# Altium PCB IsoDiffProbe.PcbDoc
Units mm, origin at the board's own origin, x right, y up, seen from the top; angles counter-clockwise.
Board outline 77.2 x 49.12 mm, 2 copper layers (Top Layer, Bottom Layer); 79 components, 48 nets, 187 pads, 218 vias.
Unrouted connection lines stored in the file: 22.
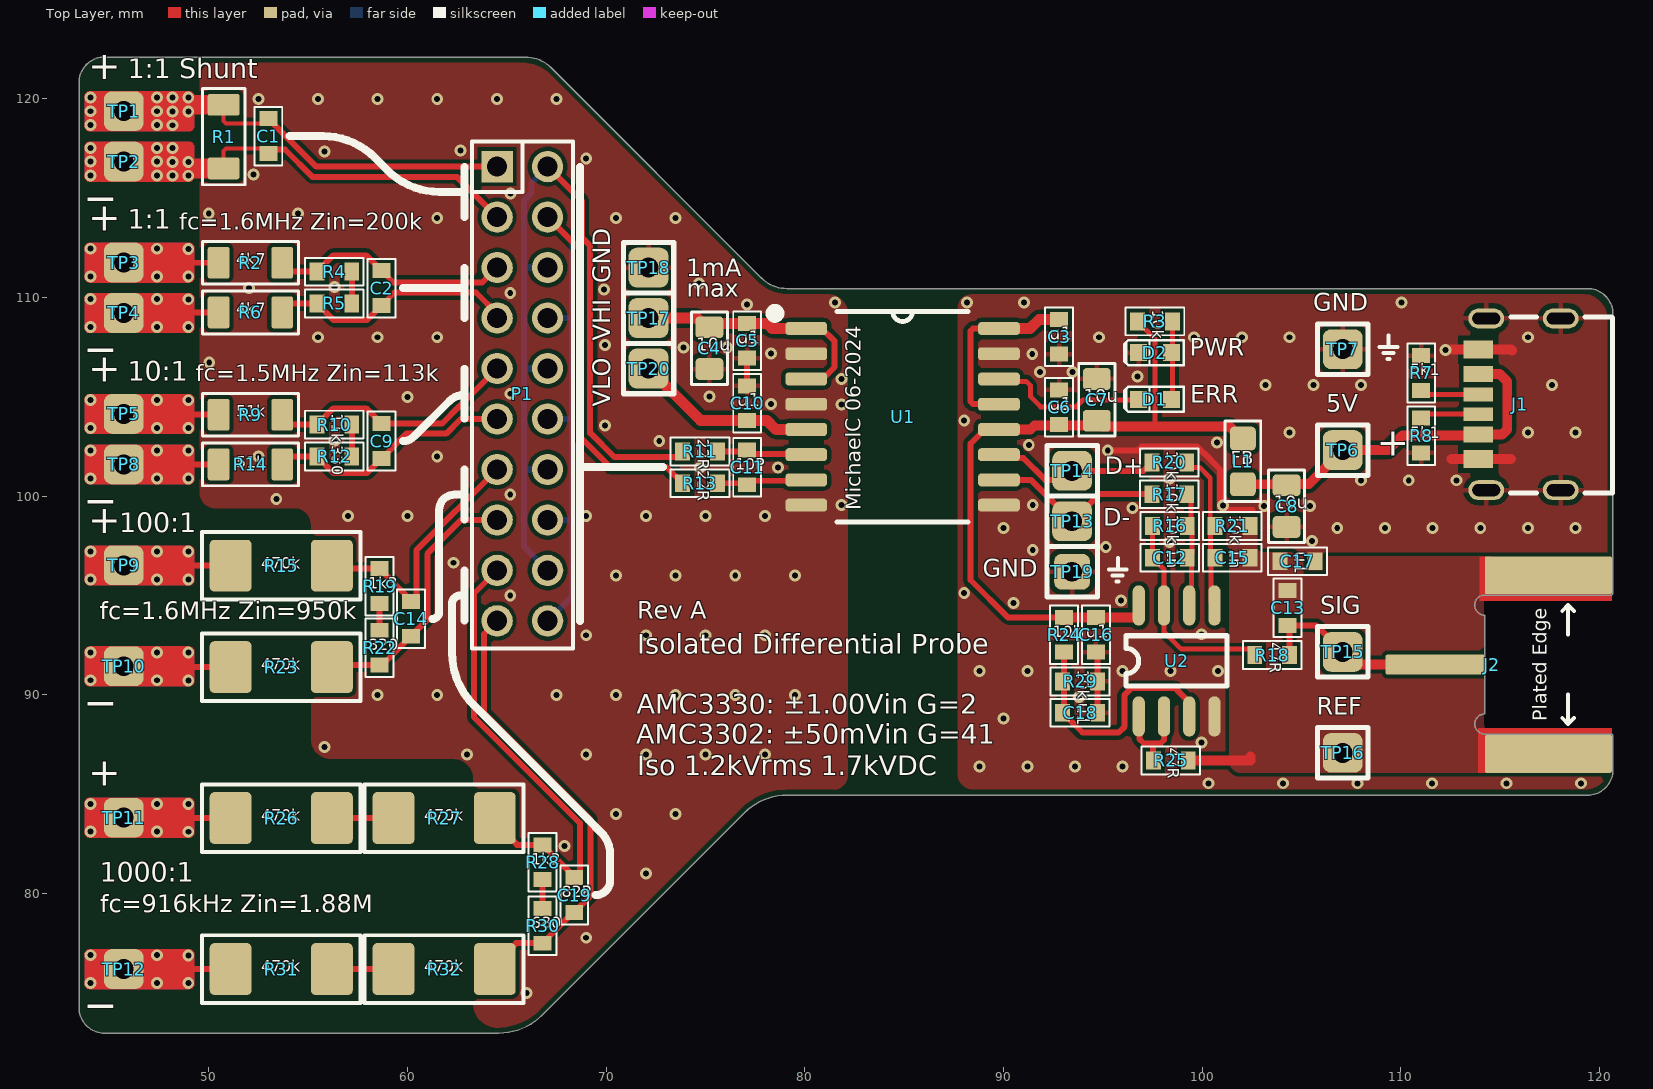
[diagram p0: Top Layer view]
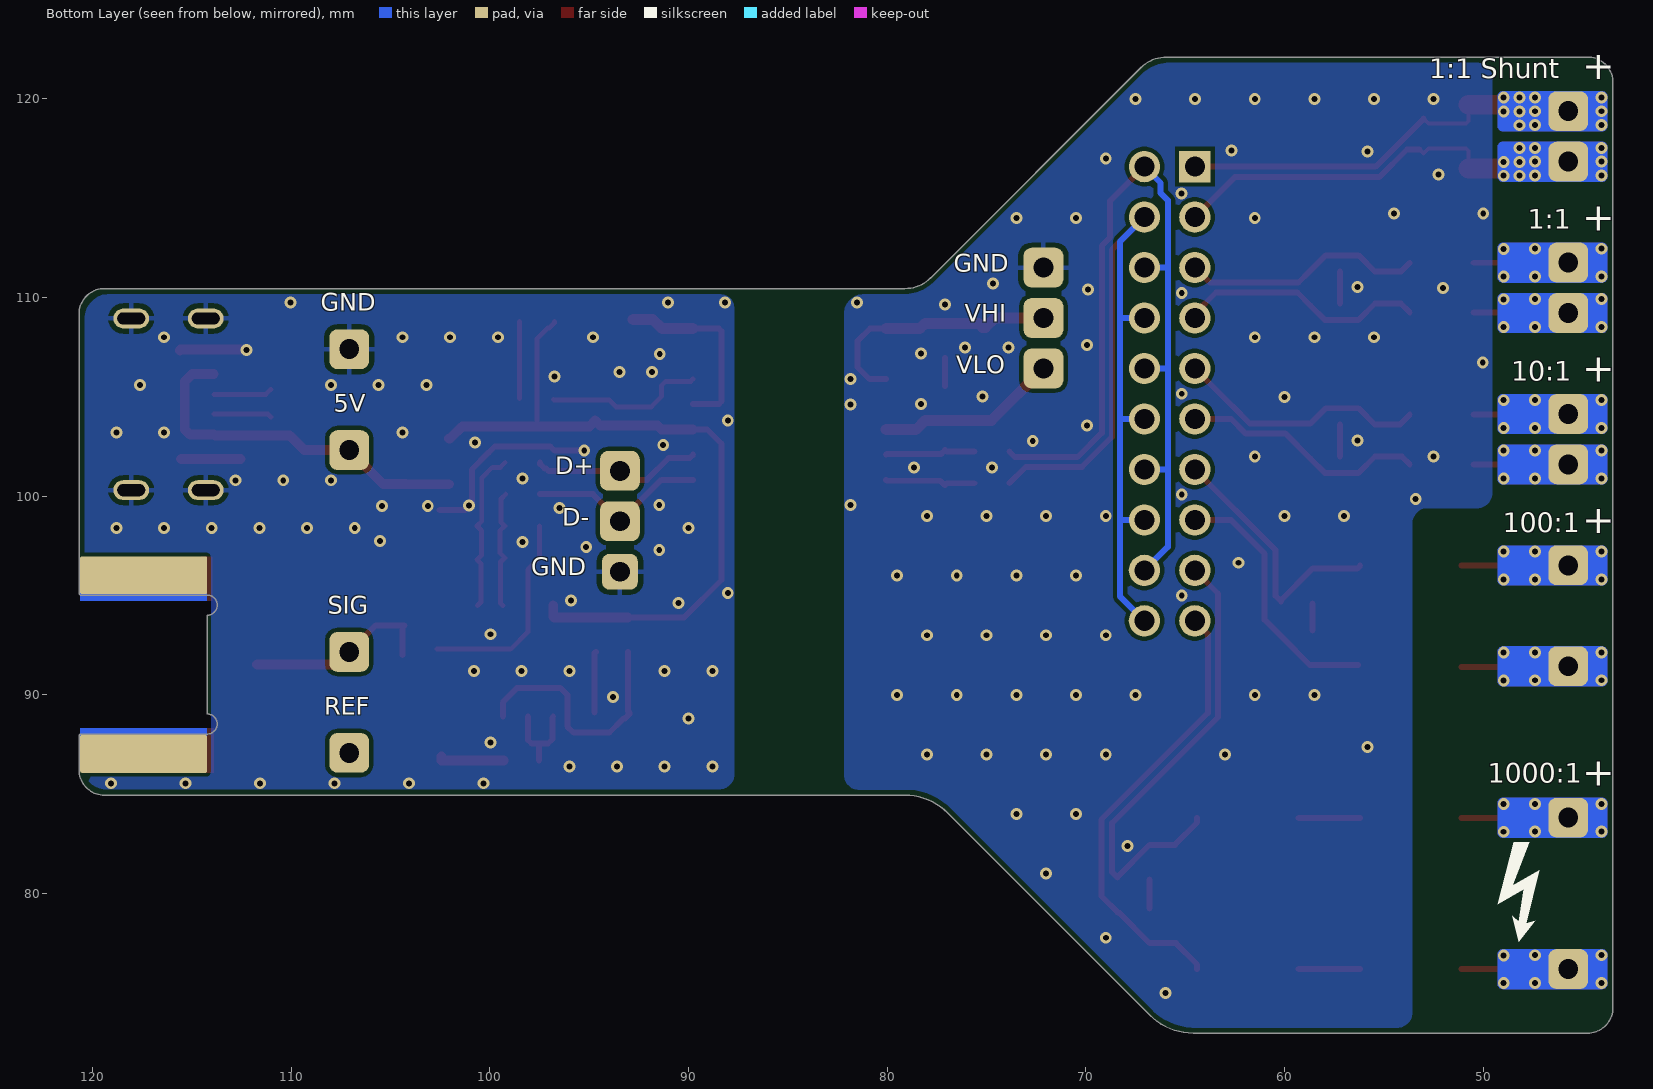
[diagram p1: Bottom Layer view, seen from below]

## Layer stack, top to bottom
Top Solder: solder mask 0.0102, Solder Resist, Dk 3.5
Top Layer: signal copper 0.0356
Dielectric 1: dielectric 0.32, FR-4, Dk 4.8
Bottom Layer: signal copper 0.0356
Bottom Solder: solder mask 0.0102, Solder Resist, Dk 3.5

## Board outline
44.745,72.975 64.605,72.975 ccw(c64.605,76.041) 66.773,73.873 76.952,84.052 cw(c79.12,81.884) 79.12,84.95 119.405,84.95 ccw(c119.405,86.22) 120.675,86.22 120.675,87.975 120.625,88.025 114.233,88.025 cw(c114.233,88.533) 113.725,88.533 cw(c114.233,88.533) 114.225,89.041 114.225,94.009 cw(c114.233,94.517) 113.725,94.517 cw(c114.233,94.517) 114.233,95.025 120.625,95.025 120.675,95.075 120.675,109.18 ccw(c119.405,109.18) 119.405,110.45 79.112,110.45 cw(c79.112,112.29) 77.811,110.989 67.239,121.561 ccw(c65.938,120.26) 65.938,122.1 44.745,122.1 ccw(c44.745,120.83) 43.475,120.83 43.475,74.245 ccw(c44.745,74.245)

## Design rules (kind name [scope] priority, off if disabled: settings)
Clearance Isolation [InNetClass('ISOLATED') vs not InNetClass('ISOLATED')] p1: gap=5.5 ignorepadtopadclearanceinfootprint=FALSE
Clearance [All] p2: gap=0.203 ignorepadtopadclearanceinfootprint=FALSE
HoleSize [All] p1: absolutevalues=TRUE maxlimit=2.54 minlimit=0.3 maxpercent=80.000 minpercent=20.000
MinimumSolderMaskSliver [All] p1: minsoldermaskwidth=0.076
PolygonConnect vgnd [InNet('VGND')] p1: connectstyle=Direct reliefconductorwidth=0.254 reliefentries=4 polygonreliefangle="90 Angle" airgapwidth=0.254
PolygonConnect isvia [isvia] p2: connectstyle=Direct reliefconductorwidth=0.254 reliefentries=4 polygonreliefangle="90 Angle" airgapwidth=0.254
PolygonConnect [All] p3: connectstyle=Relief reliefconductorwidth=0.254 reliefentries=4 polygonreliefangle="90 Angle" airgapwidth=0.254
RoutingVias [All] p1: holewidth=0.3 width=0.6 viastyle="Through Hole" minholewidth=0.3 minwidth=0.6 maxholewidth=0.3 maxwidth=0.6
SilkToSilkClearance [All] p1 off: silktosilkclearance=0
SilkToSolderMaskClearance [IsPad] p1 off: minsilkscreentomaskgap=0.076 clearancetoexposedcopper=TRUE
SolderMaskExpansion [All] p1: expansion=0.076 istentingtop=FALSE
SupplyNets "Schematic Supply Nets_4" [InNet('VIN')] p1: voltage=0.000
SupplyNets "Schematic Supply Nets_3" [InNet('GND')] p2: voltage=0.000
SupplyNets "Schematic Supply Nets_2" [InNet('HGND')] p3: voltage=0.000
SupplyNets "Schematic Supply Nets_1" [InNet('+5V')] p4: voltage=0.000
SupplyNets "Schematic Supply Nets" [InNet('ISOPWR')] p5: voltage=0.000
Width [All] p1: maxlimit=2 minlimit=0.203 preferedwidth=0.254
26 further rules are at their usual default settings.

## Classes and differential pairs
net class ISOLATED: HGND ISOLDO ISOPWR NetC1_1 NetC1_2 NetC2_1 NetC2_2 NetC9_1 NetC9_2 NetC11_1 NetC11_2 NetC14_1 NetC14_2 NetC19_1 NetC19_2 NetP1_2 NetP1_4 NetR2_1 NetR4_2 NetR6_1 NetR9_1 NetR10_2 NetR14_1 NetR15_1 NetR19_2 NetR23_1 NetR26_1 NetR26_2 NetR28_2 NetR31_1 NetR31_2

## Components (designator, comment, footprint, x,y, rotation, side; value= is the part's Value field where it differs from the comment)
C1 "NF" 0603 53,119 r270 top
C2 "NF" 0603 58.7,111.35 r270 top
C3 "100nF" 0603 92.8,107.15 r90 top
C4 "10uF / 25V" 0805_cap_Rounded 75.2,106.3 r90 top
C5 "100nF" 0603 77.1,108.7 r270 top
C6 "100nF" 0603 92.8,105.35 r270 top
C7 "10uF / 25V" 0805_cap_Rounded 94.7,103.7 r90 top
C8 "10uF / 25V" 0805_cap_Rounded 104.25,100.65 r270 top
C9 "NF" 0603 58.7,103.65 r270 top
C10 "100nF" 0603 77.1,103.8 r90 top
C11 "10pF" 0603 77.1,102.325 r270 top
C12 "1nF" 0603 99.25,96.9 r180 top
C13 "NF" 0603 104.3,93.5 r90 top
C14 "NF" 0603 60.175,94.7 r270 top
C15 "1nF" 0603 100.65,96.9 r0 top
C16 "100nF" 0603 94.654,93.902 r270 top
C17 "100nF" 0603 103.925,96.725 r0 top
C18 "100nF" 0603 92.979,89.102 r0 top
C19 "82pF" 0603 68.4,80.8 r270 top
D1 "RED" LED-0603 97.625,104.875 r180 top
D2 "GRN" LED-0603 97.625,107.225 r180 top
J1 "USB C 6-Pin" USB-C_6pin_Conn 115.975,104.625 r90 top
J2 "SMA Conn" SMA_SMD 117.425,87.025 r90 top
L1 "PBY201209T-601Y-N" 0805_Rounded 102.05,102.9 r270 top
P1 "Header 10X2" IDC20 64.516,116.586 r270 top
R1 "0R01" 1206 50.75,116.5 r90 top
R2 "4k7" 1206 50.5,111.75 r0 top
R3 "10k" 0603 98.5,108.8 r180 top
R4 "NF" 0603 55.45,111.3 r0 top
R5 "NF" 0603 57.2,109.7 r180 top
R6 "4k7" 1206 50.5,109.25 r0 top
R7 "5k1" 0603 111.025,107.075 r270 top
R8 "5k1" 0603 111.025,102.175 r90 top
R9 "51k" 1206 50.5,104.1 r0 top
R10 "11k" 0603 55.45,103.6 r0 top
R11 "220R" 0603 75.6,102.25 r180 top
R12 "330R" 0603 57.2,102 r180 top
R13 "220R" 0603 75.6,100.65 r180 top
R14 "51k" 1206 50.5,101.6 r0 top
R15 "470k" MMB0207 51.1,96.5 r0 top
R16 "10k" 0603 99.25,98.5 r180 top
R17 "10k" 0603 99.225,100.1 r180 top
R18 "47R" 0603 104.4,92 r180 top
R19 "1k3" 0603 58.6,96.35 r270 top
R20 "10k" 0603 99.225,101.7 r180 top
R21 "10k" 0603 100.65,98.5 r0 top
R22 "820R" 0603 58.6,93.25 r270 top
R23 "470k" MMB0207 51.1,91.4 r0 top
R24 "10k" 0603 93.054,93.902 r270 top
R25 "47R" 0603 99.3,86.7 r180 top
R26 "470k" MMB0207 51.1,83.8 r0 top
R27 "470k" MMB0207 59.3,83.8 r0 top
R28 "1k2" 0603 66.8,82.45 r270 top
R29 "10k" 0603 92.979,90.677 r0 top
R30 "680R" 0603 66.8,79.25 r270 top
R31 "470k" MMB0207 51.1,76.2 r0 top
R32 "470k" MMB0207 59.3,76.2 r0 top
TP1 "Test Point" TP#1 45.72,119.38 r0 top
TP2 "Test Point" TP#1 45.72,116.84 r0 top
TP3 "Test Point" TP#1 45.72,111.76 r0 top
TP4 "Test Point" TP#1 45.72,109.22 r0 top
TP5 "Test Point" TP#1 45.72,104.14 r0 top
TP6 "Test Point" TP#1 107.08,102.32 r0 top
TP7 "Test Point" TP#1 107.08,107.4 r0 top
TP8 "Test Point" TP#1 45.72,101.6 r0 top
TP9 "Test Point" TP#1 45.72,96.52 r0 top
TP10 "Test Point" TP#1 45.72,91.44 r90 top
TP11 "Test Point" TP#1 45.72,83.82 r90 top
TP12 "Test Point" TP#1 45.72,76.2 r90 top
TP13 "Test Point" TP#1 93.455,98.735 r90 top
TP14 "Test Point" TP#1 93.455,101.275 r90 top
TP15 "Test Point" TP#1 107.08,92.16 r90 top
TP16 "Test Point" TP#1 107.08,87.08 r90 top
TP17 "Test Point" TP#1 72.136,108.966 r270 top
TP18 "Test Point" TP#1 72.136,111.506 r270 top
TP19 "Test Point" TP#2 93.455,96.195 r90 top
TP20 "Test Point" TP#1 72.136,106.426 r270 top
U1 "AMC3" DW0016B 84.922,103.994 r0 top
U2 "TLC272ID" SO-8 96.81,88.912 r90 top

## Footprints (in the part's own frame and the unit in brackets; to place one, negate y for a bottom-side part, rotate by r counter-clockwise, add the part's x,y. Pads: shape width x height; smd on the part's side, far side on the other; paste and mask are expansions set on the pad)
0603 [mm] "0603 Footprint with 1mm creepage"
  rect 0.75x0.9 smd: 1(0,0) 2(1.75,0)
  silkscreen extent -0.6,-0.7 2.35,0.7, body extent 0.08,-0.4 1.68,0.4, height 0.3
0805_cap_Rounded [mm] "0805 Rounded Pads Surface Mount Chip Capacitor"
  rrect35% 1.1x1.4 smd: 1(0.1,0) 2(2.2,0)
  silkscreen extent -0.67,-0.91 2.97,0.91, body extent 0.15,-0.65 2.15,0.65, height 1.5
0805_Rounded [mm] "0805 Rounded Pads Surface Mount Chip Passive"
  rrect35% 1.2x1.3 smd: 1(0,0) 2(2.3,0)
  silkscreen extent -0.88,-0.9 3.17,0.9, body extent 0.15,-0.63 2.15,0.63, height 0.4
1206 [mm] "1206 Footprint"
  rrect20% 1.1x1.6 smd: 1(0,0) 2(3.2,0)
  silkscreen extent -0.82,-1.07 4.03,1.07, body extent 0,-0.8 3.2,0.8, height 0.6
DW0016B [mm] "Ti ISO7741 DW Package"
  rrect50% 2.1x0.65 smd mask+0.05: 1(-4.85,4.445) 2(-4.85,3.175) 3(-4.85,1.905) 4(-4.85,0.635) 5(-4.85,-0.635) 6(-4.85,-1.905) 7(-4.85,-3.175) 8(-4.85,-4.445) 9(4.85,-4.445) 10(4.85,-3.175) 11(4.85,-1.905) 12(4.85,-0.635) 13(4.85,0.635) 14(4.85,1.905) 15(4.85,3.175) 16(4.85,4.445)
  silkscreen extent -6.64,-5.3 3.3,5.43, body extent -5.17,-5.15 5.17,5.15, height 2.59
IDC20 [mil]
  rect 62x62 hole 40: 1(0,0)
  round 62 hole 40: 2(0,100) 3(100,0) 4(100,100) 5(200,0) 6(200,100) 7(300,0) 8(300,100) 9(400,0) 10(400,100) 11(500,0) 12(500,100) 13(600,0) 14(600,100) 15(700,0) 16(700,100)
  round 62.01 hole 40: 17(800,0) 18(800,100) 19(900,0) 20(900,100)
  silkscreen extent -50,-50 955,150, body extent -50,-50 955,150, height 315
LED-0603 [mm]
  rect 0.85x0.85 smd mask+0.05: A(-0.825,0) K(0.825,0)
  silkscreen extent -1.45,-0.63 1.55,0.63, body extent -0.8,-0.4 0.8,0.4, height 0.75
MMB0207 [mm] "Vishay MMB0207 MELF, Length=5.8mm, Diam=2.2mm"
  rrect20% 2.1x2.6 smd: 1(0,0) 2(5.1,0)
  silkscreen extent -1.45,-1.7 6.55,1.7, body extent -0.48,-1.12 5.57,1.12, height 2.22
SMA_SMD [mm] "SMA connector, Mid Mount End Launch"
  rrect20% 1x5 smd: FEED(4.5,5.7)
  rrect10% 1.9x6.4 smd: GND(0,0) GND(9,0)
  rrect10% 1.9x6.4 smd far side: GND(0,0) GND(9,0)
  Top Layer region: 8.3,3.2 7.7,3.2 7.7,-3.2 8.3,-3.2
  Top Layer region: 0.7,-3.2 1.3,-3.2 1.3,3.2 0.7,3.2
  Bottom Layer region: 8.3,3.2 7.7,3.2 7.7,-3.2 8.3,-3.2
  Bottom Layer region: 0.7,-3.2 1.3,-3.2 1.3,3.2 0.7,3.2
  silkscreen extent 1.5,-1.3 7.5,-0.7, body extent -0.25,-9.55 9.25,7.9, height 3.71
SO-8 [mil]
  oval 80x24 smd: 1(0,0) 2(0,-50) 3(0,-100) 4(0,-150) 5(220,-150) 6(220,-100) 7(220,-50) 8(220,0)
  silkscreen extent 60,-175 160,25, body extent -15,-175 235,25, height 47
TP#1 [mm] "Test Pin Stake"
  rrect40% 2x2 hole 1: 1(0,0)
  body extent -1.26,-1.26 1.26,1.26, height 5
TP#2 [mm] "Test Pin Stake"
  rrect40% 1.8x1.8 hole 1: 1(0,0)
  silkscreen extent -1.27,-1.27 1.27,1.27, body extent -1.26,-1.26 1.26,1.26, height 5
USB-C_6pin_Conn [mm] "6pin USB 2.0 C Type Socket for power only"
  rect 0.7x1.5 smd: A5(0.5,2.076) B5(-0.5,2.076)
  rect 0.8x1.5 smd: A9(1.52,2.076) B9(-1.52,2.076)
  rect 0.9x1.5 smd: A12(2.75,2.076) B12(-2.75,2.076)
  oval 1x1.8 hole 0.6 slot 1.4 at 90 deg: G1(-4.32,1.674) G2(-4.32,-2.076) G3(4.32,-2.076) G4(4.32,1.674)
  silkscreen extent -4.47,-4.68 4.4,0.46, body extent -4.79,-4.95 4.79,2.76, height 3.31

## Part data
C1 C2 C9 C11 C13 C14 C19: library part CAP-STD-SM, "Capacitor - S/M", Manufacturer=Yageo, Type="SMD Component", Variants=All
C3 C5 C6 C10 C12 C15 C16 C17 C18: library part CAP-STD-SM, "Capacitor - S/M", JLCPCB Part #=C14663, Manufacturer=Yageo, MPN=CC0603KRX7R9BB104, Type="SMD Component", Variants=All
C4 C7 C8: library part CAP-STD-SM, "Capacitor - S/M", JLCPCB Part #=C15850, Manufacturer=Samsung, MPN=CL21A106KAYNNNE, Type="SMD Component", Variants=All
D1 D2: library part LED
J1: library part USB-C_6pin, "USB Type C Receptacle Power Only (6 pin)", JLCPCB Part #=C2764612, Manufacturer=XKB, MPN=U262-061N-4BVC11, Alternate 1="XKB U262-061N-4BVC10", Alternate 2="HRO TYPE-C-31-M-17", Type="SMD Component", Variants=All
J2: library part SMA_SMD, "SMA connector, mid-mount"
L1: library part 742792651, "Ferrite Bead WE-CBF, Z = 600 Ohm", JLCPCB Part #=C108304, Manufacturer=Chilisin, Alternate="(0603) Wurth 742792651", Alternate 2="(0603) Sunlord UPZ1608U601-1R3TF", Alternate 3="(0805) Wurth 742792040", MPN=PBY201209T-601Y-N, Type="SMD Component", Variants=All
P1: "Header, 10-Pin, Dual row", Type=T/H
R1 R2 R6 R9 R14: library part RES-SM, "Resistor - S/M", Manufacturer=Uni-Royal, Type="SMD Component", Variants=All
R3 R16 R17 R18 R20 R21 R24 R25 R29: library part RES-SM, "Resistor - S/M", JLCPCB Part #=C25803, Manufacturer=Uni-Royal, MPN=0603WAF1003T5E, Type="SMD Component", Variants=All
R4 R5 R10 R11 R12 R13 R19 R22 R28 R30: library part RES-SM, "Resistor - S/M", Type="SMD Component", Variants=All
R7 R8: library part ResSMD, "Resistor SMD", JLCPCB Part #=C23186, Manufacturer=Uni-Royal, MPN=0603WAF5101T5E, Type="SMD Component", Variants=All
R15 R23 R26 R27 R31 R32: library part ResSMD, "Resistor SMD", Mfr1=Viking, Mfr3=Vishay, Mfr_PN1=CSRA0207FTDT4703, Mfr_PN2=CSRV0207FTDT4703, Mfr_PN3=MMB0207MC4703F, EDMI_PN=RSM447MELF, Mfr2=Viking, Note="CSRA / CSRV / MMB0207", Spec="1%, 50ppm, Critical Part", Subsection="Measurement:Voltage Measurement", Type=SMD
TP1 TP2 TP3 TP4 TP5 TP6 TP7 TP8 TP9 TP10 TP11 TP12 TP13 TP14 TP15 TP16 TP17 TP18 TP19 TP20: library part TP, "Pad for Test Point"
U1: library part AMC330X, "Isolated differential analog sensor"
U2: "LinCMOS PRECISION DUAL OPERATIONAL AMPLIFIER", =Mfr1=TI, =EDMI_PN=UTLC272ID, =Mfr_PN1=TLC272ID, =Type=SMD, =Value=TLC272ID

## Via types
v1: diameter 0.6, hole 0.3, Top Layer to Bottom Layer, tented both sides, 218 vias

## Nets (pads, with @x,y where several pads share a name; then routed paths per layer and width w, separated by ;. In a path a pad name is that pad's centre, name@x,y a point inside that pad or via, vN(x,y) a via of type N, cw(c..) or ccw(c..) an arc to the next point about the centre after c; other vN are vias at no path point)
+5V: C6.2 C7.1 C16.1 L1.1 R3.2 R24.1 U1.12 U2.8 | length 36.9
  Top Layer w0.25: R3.2 96.75,108.725 97,108.475 97.075,108.475 97.625,107.925 97.625,103.564
  Top Layer w0.3: U1.12 89.059,103.359 88.343,102.643 88.343,95.782 90.225,93.9 R24.1@93.15,93.9
  Top Layer w0.5: U1.12 91.359,103.359 91.559,103.559 94.459,103.559 C7.1 94.986,103.514 101.386,103.514 102,102.9 L1.1 ; R24.1 C16.1 ; C16.1@94.75,93.9 96.759,93.9 96.81,93.951 U2.8
GND: C3.1 C6.1 C7.2 C8.2 C16.2 C17.2 C18.2 D2.K J1.A12 J1.B12 J1.G1 J1.G2 J1.G3 J1.G4 R7.1 R8.1 R29.2 TP7.1 TP19.1 U1.9 U1.15 U2.4 | length 18.9
  Top Layer w0.3: C16.2 cw(c94.654,92.077) 94.729,92.077 R29.2 C18.2 ; v1(95.25,102.3) 96.75,102.3 96.954,102.503 99.746,102.503 100.071,102.178 100.073,102.178 100.887,101.365 100.887,101.363 100.9,101.35 100.9,99.65 101.247,99.303 102.525,99.303
  Top Layer w0.5: 112.55,101.875 115.55,101.875 ; 112.55,107.375 115.55,107.375 cw(c115.55,107.325) 115.6,107.325
  other v1: 100.325,85.55 104.075,85.55 107.825,85.55 111.575,85.55 115.325,85.55 119.075,85.55 88.8,86.4 91.2,86.4 93.6,86.4 96,86.4 99.975,87.6 90,88.8 93.8,89.9 88.8,91.2 91.2,91.2 96,91.2 98.4,91.2 100.8,91.2 99.975,93.05 90.5,94.625 95.925,94.75 88.025,95.125 91.475,97.3 95.15,97.45 98.35,97.7 105.525,97.75 90,98.4 106.8,98.4 109.2,98.4 111.6,98.4 114,98.4 116.4,98.4 118.8,98.4 96.5,99.4 103.125,99.5 105.425,99.5 101.05,99.525 91.475,99.55 108,100.8 110.4,100.8 112.8,100.8 98.35,100.9 91.275,102.575 100.75,102.7 104.4,103.2 116.4,103.2 118.8,103.2 88.025,103.8 103.2,105.6 105.6,105.6 108,105.6 117.6,105.6 96.75,106.025 91.85,106.25 93.475,106.25 91.45,107.15 112.25,107.35 94.8,108 99.6,108 102,108 104.4,108 116.4,108 88.175,109.75 91.025,109.75 110.025,109.75
HGND: C4.1 C5.2 C10.2 TP18.1 U1.2 U1.4 U1.8 | length 1.4
  Top Layer w0.3: C10.2 C5.2
  other v1: 66,75 69,77.775 72,81 67.9,82.4 70.5,84 73.5,84 63,87 69,87 72,87 75,87 78,87 55.825,87.375 58.5,90 61.5,90 67.5,90 70.5,90 73.5,90 76.5,90 79.5,90 69,93 72,93 75,93 78,93 65.175,94.995 70.5,96 73.5,96 76.5,96 79.5,96 62.325,96.65 57,99 60,99 69,99 72,99 75,99 78,99 81.85,99.55 53.4,99.85 65.175,100.075 74.725,101.45 78.65,101.45 52.5,102 61.5,102 72.675,102.775 56.325,102.8 69.95,103.55 81.85,104.625 78.3,104.65 60,105 75.2,105.025 65.175,105.155 81.85,105.9 50.025,106.725 78.3,107.175 73.9,107.475 76.075,107.475 69.95,107.6 55.5,108 58.5,108 61.5,108 77.1,109.65 81.525,109.75 65.175,110.235 69.9,110.4 52.025,110.475 56.325,110.525 74.675,110.7 61.5,114 70.5,114 73.5,114 50,114.225 54.5,114.225 65.184,115.229 52.25,116.2 69,117 55.825,117.35 62.675,117.4 52.5,120 55.5,120 58.5,120 61.5,120 64.5,120 67.5,120
ISOLDO: C10.1 TP20.1 U1.5 | length 9.2
  Top Layer w0.55: TP20.1 74.762,103.8 C10.1 78.1,103.8 78.541,103.359 U1.5
ISOPWR: C4.2 C5.1 TP17.1 U1.1 U1.3 | length 13
  Top Layer w0.3: U1.3 80.899,105.899 81.5,106.5 81.5,107.8 80.861,108.439 U1.1
  Top Layer w0.55: TP17.1 74.584,108.966 75.05,108.5 C4.2 75.4,108.7 C5.1 78.1,108.7 78.361,108.439 U1.1
NetC1_1: C1.1 P1.1 R1.2 TP1.1 | length 18.2
  Top Layer w0.203: R1.2 50.75,118.875 50.875,118.75 52.75,118.75 C1.1
  Top Layer w0.3: C1.1 55.414,116.586 P1.1
  Top Layer w1: 48.325,119.7 R1.2
  other v1: 44.05,118.675 47.39,118.675 48.17,118.67 44.05,119.375 47.39,119.375 48.17,119.37 48.97,119.37 44.05,120.075 47.39,120.075 48.17,120.07 48.97,120.07
NetC1_2: C1.2 P1.3 R1.1 TP2.1 | length 19.9
  Top Layer w0.203: R1.1 50.75,117.375 50.875,117.5 52.75,117.5 C1.2 53.2,117.45 C1.2@53.25,117.5
  Top Layer w0.3: C1.2@53.2,117.45 53.838,117.45 55.213,116.075 62.487,116.075 P1.3
  Top Layer w1: 47.675,116.45 cw(c47.725,116.45) 47.725,116.5 ; 48.17,116.5 47.725,116.5 ; R1.1 47.725,116.5
  other v1: 44.05,116.135 47.39,116.135 48.17,116.13 48.97,116.13 44.05,116.835 47.39,116.835 48.17,116.83 48.97,116.83 44.05,117.535 47.39,117.535 48.17,117.53
NetC2_1: C2.1 P1.5 R2.2 R4.1 | length 12.2
  Top Layer w0.3: R2.2 54.15,111.3 R4.1 56.275,112.125 57.925,112.125 C2.1 59.297,110.753 63.763,110.753 P1.5
NetC2_2: C2.2 P1.7 R5.2 R6.2 | length 12.6
  Top Layer w0.3: R6.2 54.15,109.7 R5.2 56.275,108.875 57.975,108.875 C2.2 59.35,110.25 63.45,110.25 64.516,109.184 P1.7
NetC3_2: C3.2 U1.13 U1.16 | length 9.7
  Top Layer w0.3: U1.13 88.478,104.629 88.343,104.764 88.343,108.304 88.478,108.439 U1.16
  Top Layer w0.55: U1.16 91.339,108.439 91.8,108.9 C3.2
NetC9_1: C9.1 P1.9 R9.2 R10.1 | length 12.8
  Top Layer w0.3: R9.2 54.2,103.6 R10.1 56.275,104.425 57.925,104.425 C9.1 61.738,103.65 62.592,104.503 62.593,104.503 P1.9
NetC9_2: C9.2 P1.11 R12.2 R14.2 | length 12.4
  Top Layer w0.3: R14.2 54.1,102 R12.2 56.275,101.175 57.975,101.175 C9.2 59.947,103.147 61.947,103.147 62.686,103.886 P1.11
NetC11_1: C11.1 R11.1 U1.6 | length 4.6
  Top Layer w0.3: R11.1 77.025,102.25 C11.1 ; C11.1@77.1,102.3 77.273,102.127 80.034,102.127 U1.6
NetC11_2: C11.2 R13.1 U1.7 | length 4.6
  Top Layer w0.3: R13.1 77.025,100.65 C11.2 ; C11.2@77.1,100.55 77.327,100.777 80.03,100.777 U1.7
NetC12_1: C12.1 R16.1 R17.1 U2.6 | length 6.1
  Top Layer w0.25: R17.1@99.2,100.1 99.442,99.858 99.442,98.692 R16.1 99.495,98.255 99.495,97.145 C12.1 99.463,96.687 99.463,94.613 U2.6
NetC12_2: C12.2 R16.2 R18.2 U2.7 | length 10.5
  Top Layer w0.25: R16.2 C12.2 98.08,96.32 U2.7 98.08,93.17 98.95,92.3 R18.2@102.65,92.3
NetC13_1: C13.1 J2.FEED R18.1 TP15.1 | length 9.8
  Top Layer w0.3: R18.1 104.4,93.4 C13.1 105.74,93.5 TP15.1
  Top Layer w0.5: TP15.1 107.715,91.525 J2.FEED
NetC14_1: C14.1 P1.13 R15.2 R19.1 | length 13.2
  Top Layer w0.3: R15.2 56.35,96.35 R19.1 60.175,94.775 C14.1 60.45,94.975 60.45,97.28 P1.13
NetC14_2: C14.2 P1.15 R22.2 R23.2 | length 13.2
  Top Layer w0.3: R23.2@56.3,91.5 R22.2 58.725,91.5 C14.2 61,93.775 61,97.1 62.706,98.806 P1.15
NetC15_1: C15.1 R20.1 R21.1 U2.5 | length 8.4
  Top Layer w0.25: R20.1 99.475,101.45 99.875,101.45 100.408,100.917 100.408,98.742 R21.1 100.422,98.272 100.422,97.028 100.65,96.8 100.45,96.6 100.45,94.67 U2.5
NetC18_1: C18.1 R24.2 R29.1 U2.3 | length 12.8
  Top Layer w0.3: R24.2 93.054,89.177 C18.1 92.979,89.027 93.204,88.802 93.279,88.802 93.979,88.102 95.802,88.102 96.099,88.399 96.099,89.999 96.45,90.35 98.625,90.35 99.35,89.625 U2.3
NetC19_1: C19.1 P1.17 R27.2 R28.1 | length 23.7
  Top Layer w0.3: R27.2 64.4,83.575 65.525,82.45 R28.1 68.4,80.85 C19.1 68.675,81.075 68.675,83.55 63.35,88.875 63.35,95.1 P1.17
NetC19_2: C19.2 P1.19 R30.2 R32.2 | length 22.8
  Top Layer w0.3: R32.2 64.4,76.425 65.475,77.5 R30.2 C19.2@68.35,79.05 ; P1.19 63.853,93.063 63.853,89.097 69.225,83.725 69.225,79.875 C19.2
NetD1_A: D1.A D2.A R3.1 | length 3.9
  Top Layer w0.25: D1.A@98.5,104.925 R3.1
NetD1_K: D1.K U1.14 | length 8.1
  Top Layer w0.25: U1.14 89.888,105.783 91.142,105.783 91.35,105.575 91.35,105.025 91.875,104.5 93.65,104.5 94,104.85 96.775,104.85 D1.K
NetJ1_A5: J1.A5 R7.2 | length 3
  Top Layer w0.25: R7.2@111.025,105.375 111.275,105.125 J1.A5
NetJ1_B5: J1.B5 R8.2 | length 2.9
  Top Layer w0.25: R8.2@111.025,103.975 111.175,104.125 J1.B5
NetP1_2: P1.2 P1.6 P1.10 P1.14 P1.18 R11.2 | length 44.4
  Top Layer w0.3: P1.2 68.778,114.864 68.778,113.035 69.2,112.614 69.2,103.187 70.412,101.975 73.575,101.975 R11.2
  Bottom Layer w0.3: P1.18 65.875,97.447 65.875,101.375 ; P1.14 65.904,101.346 65.875,101.375 ; P1.10 65.876,106.426 65.875,106.425 ; P1.6 65.906,111.506 65.875,111.475 ; P1.2 66.235,115.765 66.235,115.256 65.875,114.896 65.875,111.475 ; 65.875,101.375 65.875,106.425 ; 65.875,106.425 65.875,111.475
NetP1_4: P1.4 P1.8 P1.12 P1.16 P1.20 R13.2 | length 42.9
  Top Layer w0.3: P1.4 68.697,112.405 68.697,102.978 70.203,101.472 73.028,101.472 R13.2
  Bottom Layer w0.3: P1.20 68.275,94.945 68.275,98.775 ; P1.16 68.244,98.806 68.275,98.775 ; P1.12 68.211,103.886 68.275,103.95 ; P1.8 68.266,108.966 68.275,108.975 ; P1.4 68.275,112.827 68.275,108.975 ; 68.275,98.775 68.275,103.95 ; 68.275,103.95 68.275,108.975
NetR2_1: R2.1 TP3.1 | length 3.5
  Top Layer w0.3: 47.05,111.75 R2.1
  other v1: 44.05,111.055 47.39,111.055 48.97,111.05 44.05,112.455 47.39,112.455 48.97,112.45
NetR4_2: R4.2 R5.1 | length 1.6
  Top Layer w0.3: R5.1 R4.2
NetR6_1: R6.1 TP4.1 | length 2.5
  Top Layer w0.3: 48.05,109.25 R6.1
  other v1: 44.05,108.515 47.39,108.515 48.97,108.51 44.05,109.915 47.39,109.915 48.97,109.91
NetR9_1: R9.1 TP5.1 | length 1.8
  Top Layer w0.3: 48.675,104.1 R9.1
  other v1: 44.05,103.435 47.39,103.435 48.97,103.43 44.05,104.835 47.39,104.835 48.97,104.83
NetR10_2: R10.2 R12.1 | length 1.6
  Top Layer w0.3: R12.1 R10.2
NetR14_1: R14.1 TP8.1 | length 1.9
  Top Layer w0.3: 48.575,101.6 R14.1
  other v1: 44.05,100.895 47.39,100.895 48.97,100.89 44.05,102.295 47.39,102.295 48.97,102.29
NetR15_1: R15.1 TP9.1 | length 2.8
  Top Layer w0.3: 48.28,96.5 R15.1
  other v1: 44.05,95.815 47.39,95.815 48.97,95.81 44.05,97.215 47.39,97.215 48.97,97.21
NetR17_2: R17.2 TP13.1 U1.10 | length 9.1
  Top Layer w0.3: U1.10 91.371,100.819 TP13.1 94.82,100.1 R17.2
NetR19_2: R19.2 R22.1 | length 1.3
  Top Layer w0.3: R22.1 R19.2
NetR20_2: R20.2 TP14.1 U1.11 | length 8
  Top Layer w0.3: U1.11 89.939,101.922 91.003,101.922 92.1,100.825 TP14.1@93.005,100.825 ; TP14.1 97.05,101.275 97.175,101.4 97.25,101.4 97.475,101.625 R20.2
NetR23_1: R23.1 TP10.1 | length 2.8
  Top Layer w0.3: 48.3,91.4 R23.1
  other v1: 44.05,90.735 47.39,90.735 48.97,90.73 44.05,92.135 47.39,92.135 48.97,92.13
NetR25_2: R25.2 U2.1 U2.2 | length 4.6
  Top Layer w0.3: U2.1 96.851,88.871 96.851,87.774 97.075,87.55 97.55,87.55 97.9,87.55 98.08,87.73 U2.2 ; R25.2@97.525,86.7 97.525,87.55
NetR26_1: R26.1 TP11.1 | length 2.3
  Top Layer w0.3: 48.825,83.8 R26.1
  other v1: 44.05,83.115 47.39,83.115 48.97,83.11 44.05,84.515 47.39,84.515 48.97,84.51
NetR26_2: R26.2 R27.1 | length 3.1
  Top Layer w0.3: R26.2 R27.1
NetR28_2: R28.2 R30.1 | length 1.4
  Top Layer w0.3: R30.1 R28.2
NetR31_1: R31.1 TP12.1 | length 2.5
  Top Layer w0.3: 48.55,76.2 R31.1
  other v1: 44.05,75.495 47.39,75.495 48.97,75.49 44.05,76.895 47.39,76.895 48.97,76.89
NetR31_2: R31.2 R32.1 | length 3.1
  Top Layer w0.3: R31.2 R32.1
VGND: C13.2 C15.2 C17.1 J2.GND R21.2 R25.1 TP16.1 | length 3.3
  Top Layer w0.5: R25.1 102.425,86.7 102.425,86.9
VIN: C8.1 J1.A9 J1.B9 L1.2 TP6.1 | length 18.5
  Top Layer w0.5: L1.2 104.2,100.6 104.219,100.619 105.379,100.619 TP6.1 109.345,102.32 110.075,103.05 113.844,103.05 J1.B9 115.104,103.105 115.356,103.357 115.356,105.77 114.981,106.145 J1.A9

## Polygon pours and split planes (outlines as drawn)
GND on Top Layer "TL_GND" (solid, remove dead copper, pour order 1): 87.7,109.45 87.7,86 ccw(c88.45,86) 88.45,85.25 119.35,85.25 ccw(c119.35,86.3) 120.4,86.3 120.4,108.905 ccw(c119.13,108.905) 119.13,110.175 117.4,110.175 88.425,110.175 ccw(c88.425,109.45)
HGND on Top Layer "TL-HGND" (solid, remove dead copper, pour order 4): 56.15,86.775 62.309,86.775 cw(c62.309,85.759) 63.325,85.759 63.325,74.437 ccw(c64.512,74.437) 64.512,73.25 ccw(c64.512,76.298) 66.668,74.143 76.857,84.332 cw(c79.012,82.177) 79.013,85.225 81.413,85.225 ccw(c81.413,85.987) 82.175,85.987 82.175,109.159 ccw(c81.159,109.159) 81.159,110.175 79.092,110.175 cw(c79.092,112.207) 77.655,110.77 67.195,121.23 ccw(c65.758,119.793) 65.758,121.825 50.312,121.825 ccw(c50.312,121.063) 49.55,121.063 49.55,100.162 ccw(c50.312,100.162) 50.312,99.4 54.3,99.4 cw(c54.3,98.55) 55.15,98.55 55.15,87.775 ccw(c56.15,87.775)
VGND on Top Layer "TL-VGND" (solid, remove dead copper, pour order 0): 104.7,96.975 ccw(c104.5,96.975) 104.5,97.175 103.029,97.175 cw(c103.029,97.429) 102.775,97.429 102.775,98.95 101.225,98.95 101.225,97.525 ccw(c101.375,97.525) 101.375,97.375 101.375,86.663 ccw(c101.963,86.663) 101.963,86.075 114.192,86.075 114.167,96.975
GND on Bottom Layer "TL_GND" (solid, remove dead copper, pour order 6): 87.7,109.45 87.7,86 ccw(c88.45,86) 88.45,85.25 119.35,85.25 ccw(c119.35,86.3) 120.4,86.3 120.4,108.905 ccw(c119.13,108.905) 119.13,110.175 117.4,110.175 88.425,110.175 ccw(c88.425,109.45)
HGND on Bottom Layer "BL-HGND" (solid, remove dead copper, pour order 2): 82.175,109.159 ccw(c81.159,109.159) 81.159,110.175 79.092,110.175 cw(c79.092,112.207) 77.655,110.77 67.195,121.23 ccw(c65.758,119.793) 65.758,121.825 50.312,121.825 ccw(c50.312,121.063) 49.55,121.063 49.55,100.162 ccw(c50.312,100.162) 50.312,99.4 52.813,99.4 cw(c52.813,98.638) 53.575,98.638 53.575,74.012 ccw(c54.337,74.012) 54.337,73.25 64.512,73.25 ccw(c64.512,76.298) 66.668,74.143 76.857,84.332 cw(c79.013,82.177) 79.013,85.225 81.413,85.225 ccw(c81.413,85.987) 82.175,85.987 82.175,100.725

## Other copper
Top Layer:
  rectangle net VGND: 113.875,86.075 114.5,88.325
  rectangle net VGND: 113.95,94.725 114.55,96.975
  region net NetR31_1: 44.004,75.195 cw(c44.004,75.449) 43.75,75.449 43.75,76.941 cw(c44.004,76.941) 44.004,77.195 49.021,77.195 cw(c49.021,76.941) 49.275,76.941 49.275,75.449 cw(c49.021,75.449) 49.021,75.195 46.5,75.195
  region net NetR26_1: 44.004,82.815 cw(c44.004,83.069) 43.75,83.069 43.75,84.561 cw(c44.004,84.561) 44.004,84.815 49.021,84.815 cw(c49.021,84.561) 49.275,84.561 49.275,83.069 cw(c49.021,83.069) 49.021,82.815 46.5,82.815
  region net NetR23_1: 44.004,90.435 cw(c44.004,90.689) 43.75,90.689 43.75,92.181 cw(c44.004,92.181) 44.004,92.435 49.021,92.435 cw(c49.021,92.181) 49.275,92.181 49.275,90.689 cw(c49.021,90.689) 49.021,90.435 46.5,90.435
  region net NetR15_1: 44.004,95.515 cw(c44.004,95.769) 43.75,95.769 43.75,97.261 cw(c44.004,97.261) 44.004,97.515 49.021,97.515 cw(c49.021,97.261) 49.275,97.261 49.275,95.769 cw(c49.021,95.769) 49.021,95.515 46.5,95.515
  region net NetR14_1: 44.004,100.595 cw(c44.004,100.849) 43.75,100.849 43.75,102.341 cw(c44.004,102.341) 44.004,102.595 49.021,102.595 cw(c49.021,102.341) 49.275,102.341 49.275,100.849 cw(c49.021,100.849) 49.021,100.595 46.5,100.595
  region net NetR9_1: 44.004,103.135 cw(c44.004,103.389) 43.75,103.389 43.75,104.881 cw(c44.004,104.881) 44.004,105.135 49.021,105.135 cw(c49.021,104.881) 49.275,104.881 49.275,103.389 cw(c49.021,103.389) 49.021,103.135 46.5,103.135
  region net NetR6_1: 44.004,108.215 cw(c44.004,108.469) 43.75,108.469 43.75,109.961 cw(c44.004,109.961) 44.004,110.215 49.021,110.215 cw(c49.021,109.961) 49.275,109.961 49.275,108.469 cw(c49.021,108.469) 49.021,108.215 46.5,108.215
  region net NetR2_1: 44.004,110.755 cw(c44.004,111.009) 43.75,111.009 43.75,112.501 cw(c44.004,112.501) 44.004,112.755 49.021,112.755 cw(c49.021,112.501) 49.275,112.501 49.275,111.009 cw(c49.021,111.009) 49.021,110.755 46.5,110.755
  region net NetC1_1: 44.004,118.375 cw(c44.004,118.629) 43.75,118.629 43.75,120.121 cw(c44.004,120.121) 44.004,120.375 49.021,120.375 cw(c49.021,120.121) 49.275,120.121 49.275,118.629 cw(c49.021,118.629) 49.021,118.375 46.5,118.375
  region net NetC1_2: 44.004,115.835 cw(c44.004,116.089) 43.75,116.089 43.75,117.581 cw(c44.004,117.581) 44.004,117.835 49.021,117.835 cw(c49.021,117.581) 49.275,117.581 49.275,116.089 cw(c49.021,116.089) 49.021,115.835 46.5,115.835
Bottom Layer:
  region net NetR31_1: 44.004,75.195 cw(c44.004,75.449) 43.75,75.449 43.75,76.941 cw(c44.004,76.941) 44.004,77.195 49.021,77.195 cw(c49.021,76.941) 49.275,76.941 49.275,75.449 cw(c49.021,75.449) 49.021,75.195 46.5,75.195
  region net NetR26_1: 44.004,82.815 cw(c44.004,83.069) 43.75,83.069 43.75,84.561 cw(c44.004,84.561) 44.004,84.815 49.021,84.815 cw(c49.021,84.561) 49.275,84.561 49.275,83.069 cw(c49.021,83.069) 49.021,82.815 46.5,82.815
  region net NetR23_1: 44.004,90.435 cw(c44.004,90.689) 43.75,90.689 43.75,92.181 cw(c44.004,92.181) 44.004,92.435 49.021,92.435 cw(c49.021,92.181) 49.275,92.181 49.275,90.689 cw(c49.021,90.689) 49.021,90.435 46.5,90.435
  region net NetR15_1: 44.004,95.515 cw(c44.004,95.769) 43.75,95.769 43.75,97.261 cw(c44.004,97.261) 44.004,97.515 49.021,97.515 cw(c49.021,97.261) 49.275,97.261 49.275,95.769 cw(c49.021,95.769) 49.021,95.515 46.5,95.515
  region net NetR14_1: 44.004,100.595 cw(c44.004,100.849) 43.75,100.849 43.75,102.341 cw(c44.004,102.341) 44.004,102.595 49.021,102.595 cw(c49.021,102.341) 49.275,102.341 49.275,100.849 cw(c49.021,100.849) 49.021,100.595 46.5,100.595
  region net NetR9_1: 44.004,103.135 cw(c44.004,103.389) 43.75,103.389 43.75,104.881 cw(c44.004,104.881) 44.004,105.135 49.021,105.135 cw(c49.021,104.881) 49.275,104.881 49.275,103.389 cw(c49.021,103.389) 49.021,103.135 46.5,103.135
  region net NetR6_1: 44.004,108.215 cw(c44.004,108.469) 43.75,108.469 43.75,109.961 cw(c44.004,109.961) 44.004,110.215 49.021,110.215 cw(c49.021,109.961) 49.275,109.961 49.275,108.469 cw(c49.021,108.469) 49.021,108.215 46.5,108.215
  region net NetR2_1: 44.004,110.755 cw(c44.004,111.009) 43.75,111.009 43.75,112.501 cw(c44.004,112.501) 44.004,112.755 49.021,112.755 cw(c49.021,112.501) 49.275,112.501 49.275,111.009 cw(c49.021,111.009) 49.021,110.755 46.5,110.755
  region net NetC1_2: 44.004,115.835 cw(c44.004,116.089) 43.75,116.089 43.75,117.581 cw(c44.004,117.581) 44.004,117.835 49.021,117.835 cw(c49.021,117.581) 49.275,117.581 49.275,116.089 cw(c49.021,116.089) 49.021,115.835 46.5,115.835
  region net NetC1_1: 44.004,118.375 cw(c44.004,118.629) 43.75,118.629 43.75,120.121 cw(c44.004,120.121) 44.004,120.375 49.021,120.375 cw(c49.021,120.121) 49.275,120.121 49.275,118.629 cw(c49.021,118.629) 49.021,118.375 46.5,118.375
  pour cut-out: 114.017,95.941 114.017,87.8 117.875,87.8 117.875,95.95

## Silkscreen, mask and mechanical layers (free items; w line width, h text height)
Top Overlay:
  lines w0.2: 95.3,96.3 96.2,96.3 ; 95.5,96 96,96 ; 95.7,95.7 95.8,95.7 ; 95.75,96.3 ccw(c95.75,96.307) 95.757,96.307 95.757,96.888 ; 108.925,107.505 109.825,107.505 ; 109.125,107.205 109.625,107.205 ; 109.325,106.905 109.425,106.905 ; 109.375,107.505 ccw(c109.375,107.512) 109.382,107.512 109.382,108.093
  lines w0.4: 54.075,118.125 55.751,118.125 cw(c55.751,114.446) 58.353,117.047 59.006,116.394 ccw(c61.608,118.995) 61.608,115.316 62.875,115.316 ; 59.775,102.775 ccw(c59.775,103.56) 60.33,103.005 62.107,104.782 cw(c62.875,104.014) 62.875,105.1 ; 59.775,110.475 62.85,110.475 ; 61.25,93.825 ccw(c61.25,94.175) 61.6,94.175 61.6,99.314 cw(c62.362,99.314) 62.362,100.076 62.875,100.076 ; 62.875,93.737 62.875,94.996 ; 62.875,96.255 62.875,94.996 ; 62.875,98.817 62.875,100.076 ; 62.875,101.335 62.875,100.076 ; 62.875,103.897 62.875,105.156 62.875,106.415 ; 62.875,108.977 62.875,110.236 62.875,111.495 ; 62.875,114.057 62.875,115.316 ; 62.875,116.575 62.875,115.316 ; 68.697,93.725 68.697,102.616 68.697,116.575 ; 68.75,101.45 cw(c68.81,101.39) 68.81,101.475 72.875,101.475 ; 69.475,79.925 ccw(c69.475,80.65) 70.2,80.65 70.2,81.101 70.2,81.989 ccw(c68.664,81.989) 69.75,83.075 69.122,83.703 63.453,89.372 63.328,89.497 cw(c65.929,92.099) 62.25,92.099 62.25,94.6 cw(c62.646,94.6) 62.646,94.996 62.875,94.996
  text "1:1 Shunt" at 45.934,120.706 h1.7
  text "+" at 43.927,120.512 h2.45
  text "_" at 43.938,115.057 h3.1 r180
  text "1:1" at 45.936,113.128 h1.7
  text "fc=1.6MHz Zin=200k" at 48.525,113.127 h1.4
  text "+" at 43.927,112.892 h2.45
  text "4k7" at 51.375,111.45 h1.02
  text "1mA" at 74.028,110.759 h1.52
  text "GND" at 70.513,110.725 h1.52 r90
  text "max" at 74.048,109.74 h1.52
  text "10k" at 97.3,109.375 h1.02 r270
  text "GND" at 105.6,109.037 h1.52
  text "4k7" at 51.375,108.95 h1.02
  text "VHI" at 70.513,107.833 h1.52 r90
  text "u1" at 92.3,107.65 h1.14
  text "_" at 43.938,107.437 h3.1 r180
  text "u1" at 76.6,107.45 h1.14
  text "10u" at 74.55,107.1 h1.14
  text "PWR" at 99.388,106.762 h1.52
  text "5k1" at 110.475,105.875 h1.02
  text "fc=1.5MHz Zin=113k" at 49.35,105.502 h1.4
  text "10:1" at 45.914,105.488 h1.7
  text "+" at 43.927,105.272 h2.45
  text "VLO" at 70.513,104.501 h1.52 r90
  text "10u" at 94.05,104.5 h1.14
  text "ERR" at 99.414,104.412 h1.52
  text "u1" at 76.6,104.3 h1.14
  text "11k" at 56,104.175 h1.02 r270
  text "u1" at 92.3,104.1 h1.14
  text "5V" at 106.247,103.946 h1.52
  text "51k" at 51.375,103.8 h1.02
  text "22R" at 74.4,102.9 h1.02 r270
  text "5k1" at 110.475,102.725 h1.02
  text "330" at 56,102.575 h1.02 r270
  text "10k" at 98.025,102.275 h1.02 r270
  text "+" at 108.777,101.547 h2.45
  text "FB" at 101.45,101.375 h1.14
  text "22R" at 74.4,101.3 h1.02 r270
  text "51k" at 51.375,101.225 h1.02
  text "10P" at 76.5,101.125 h1.02
  text "D+" at 95.087,100.812 h1.52
  text "10k" at 98.025,100.675 h1.02 r270
  text "_" at 43.938,99.817 h3.1 r180
  text "MichaelC 06-2024" at 83.066,99.286 h1.3 r90
  text "10u" at 103.6,99.15 h1.14
  text "10k" at 98.05,99.075 h1.02 r270
  text "10k" at 101.2,99.075 h1.02 r270
  text "D-" at 95.035,98.212 h1.52
  text "100:1" at 45.491,97.863 h1.7
  text "+" at 43.927,97.652 h2.45
  text "1n" at 98.05,97.375 h1.02 r270
  text "1n" at 101.2,97.375 h1.02 r270
  text "u1" at 104.425,97.225 h1.14 r270
  text "470k" at 52.65,96.15 h1.02
  text "GND" at 88.95,95.637 h1.52
  text "1k3" at 58.025,95.15 h1.02
  text "SIG" at 105.941,93.777 h1.52
  text "Rev A" at 71.575,93.528 h1.5
  text "fc=1.6MHz Zin=950k" at 44.525,93.494 h1.5
  text "10k" at 92.479,92.702 h1.02
  text "u1" at 94.154,92.652 h1.14
  text "47R" at 103.2,92.65 h1.02 r270
  text "820" at 58.025,92.05 h1.02
  text "Isolated Differential Probe" at 71.57,91.73 h1.7
  text "10k" at 93.529,91.252 h1.02 r270
  text "470k" at 52.65,91.05 h1.02
  text "_" at 43.938,89.657 h3.1 r180
  text "u1" at 93.479,89.602 h1.14 r270
  text "AMC3330: ±1.00Vin G=2" at 71.55,88.731 h1.7
  text "REF" at 105.768,88.697 h1.52
  text "47R" at 98.075,87.35 h1.02 r270
  text "AMC3302: ±50mVin G=41" at 71.525,87.206 h1.7
  text "Iso 1.2kVrms 1.7kVDC" at 71.575,85.63 h1.7
  text "+" at 43.927,84.952 h2.45
  text "470k" at 52.65,83.45 h1.02
  text "470k" at 60.85,83.45 h1.02
  text "1k2" at 66.225,81.25 h1.02
  text "1000:1" at 44.519,80.263 h1.7
  text "82P" at 67.775,79.6 h1.02
  text "fc=916kHz Zin=1.88M" at 44.55,78.744 h1.5
  text "680" at 66.225,78.05 h1.02
  text "470k" at 52.65,75.85 h1.02
  text "470k" at 60.85,75.85 h1.02
  text "_" at 43.938,74.417 h3.1 r180
Bottom Overlay:
  region: 48.473,82.581 49.265,79.468 47.954,80.218 48.213,78.589 48.545,78.877 48.213,77.566 47.406,78.603 47.377,78.632 47.824,78.517 47.176,81.183 48.53,80.39 48.545,80.376 47.68,82.581
  text "1:1 Shunt" at 52.716,120.706 h1.7
  text "+" at 45.023,120.512 h2.45
  text "1:1" at 47.764,113.128 h1.7
  text "+" at 45.023,112.892 h2.45
  text "GND" at 76.65,110.987 h1.52
  text "GND" at 108.5,109.037 h1.52
  text "VHI" at 76.092,108.487 h1.52
  text "VLO" at 76.524,105.887 h1.52
  text "10:1" at 48.586,105.488 h1.7
  text "+" at 45.023,105.272 h2.45
  text "5V" at 107.853,103.946 h1.52
  text "D+" at 96.713,100.812 h1.52
  text "D-" at 96.365,98.212 h1.52
  text "100:1" at 49.009,97.863 h1.7
  text "+" at 45.023,97.652 h2.45
  text "GND" at 97.925,95.712 h1.52
  text "SIG" at 108.159,93.777 h1.52
  text "REF" at 108.332,88.697 h1.52
  text "1000:1" at 49.781,85.238 h1.7
  text "+" at 45.023,84.952 h2.45
Top Solder:
  region: 44.004,75.195 cw(c44.004,75.449) 43.75,75.449 43.75,76.941 cw(c44.004,76.941) 44.004,77.195 49.021,77.195 cw(c49.021,76.941) 49.275,76.941 49.275,75.449 cw(c49.021,75.449) 49.021,75.195 46.5,75.195
  region: 44.004,82.815 cw(c44.004,83.069) 43.75,83.069 43.75,84.561 cw(c44.004,84.561) 44.004,84.815 49.021,84.815 cw(c49.021,84.561) 49.275,84.561 49.275,83.069 cw(c49.021,83.069) 49.021,82.815 46.5,82.815
  region: 44.004,90.435 cw(c44.004,90.689) 43.75,90.689 43.75,92.181 cw(c44.004,92.181) 44.004,92.435 49.021,92.435 cw(c49.021,92.181) 49.275,92.181 49.275,90.689 cw(c49.021,90.689) 49.021,90.435 46.5,90.435
  region: 44.004,95.515 cw(c44.004,95.769) 43.75,95.769 43.75,97.261 cw(c44.004,97.261) 44.004,97.515 49.021,97.515 cw(c49.021,97.261) 49.275,97.261 49.275,95.769 cw(c49.021,95.769) 49.021,95.515 46.5,95.515
  region: 44.004,100.595 cw(c44.004,100.849) 43.75,100.849 43.75,102.341 cw(c44.004,102.341) 44.004,102.595 49.021,102.595 cw(c49.021,102.341) 49.275,102.341 49.275,100.849 cw(c49.021,100.849) 49.021,100.595 46.5,100.595
  region: 44.004,103.135 cw(c44.004,103.389) 43.75,103.389 43.75,104.881 cw(c44.004,104.881) 44.004,105.135 49.021,105.135 cw(c49.021,104.881) 49.275,104.881 49.275,103.389 cw(c49.021,103.389) 49.021,103.135 46.5,103.135
  region: 44.004,108.215 cw(c44.004,108.469) 43.75,108.469 43.75,109.961 cw(c44.004,109.961) 44.004,110.215 49.021,110.215 cw(c49.021,109.961) 49.275,109.961 49.275,108.469 cw(c49.021,108.469) 49.021,108.215 46.5,108.215
  region: 44.004,110.755 cw(c44.004,111.009) 43.75,111.009 43.75,112.501 cw(c44.004,112.501) 44.004,112.755 49.021,112.755 cw(c49.021,112.501) 49.275,112.501 49.275,111.009 cw(c49.021,111.009) 49.021,110.755 46.5,110.755
  region: 44.004,118.375 cw(c44.004,118.629) 43.75,118.629 43.75,120.121 cw(c44.004,120.121) 44.004,120.375 49.021,120.375 cw(c49.021,120.121) 49.275,120.121 49.275,118.629 cw(c49.021,118.629) 49.021,118.375 46.5,118.375
  region: 44.004,115.835 cw(c44.004,116.089) 43.75,116.089 43.75,117.581 cw(c44.004,117.581) 44.004,117.835 49.021,117.835 cw(c49.021,117.581) 49.275,117.581 49.275,116.089 cw(c49.021,116.089) 49.021,115.835 46.5,115.835
Bottom Solder:
  region: 44.004,75.195 cw(c44.004,75.449) 43.75,75.449 43.75,76.941 cw(c44.004,76.941) 44.004,77.195 49.021,77.195 cw(c49.021,76.941) 49.275,76.941 49.275,75.449 cw(c49.021,75.449) 49.021,75.195 46.5,75.195
  region: 44.004,82.815 cw(c44.004,83.069) 43.75,83.069 43.75,84.561 cw(c44.004,84.561) 44.004,84.815 49.021,84.815 cw(c49.021,84.561) 49.275,84.561 49.275,83.069 cw(c49.021,83.069) 49.021,82.815 46.5,82.815
  region: 44.004,90.435 cw(c44.004,90.689) 43.75,90.689 43.75,92.181 cw(c44.004,92.181) 44.004,92.435 49.021,92.435 cw(c49.021,92.181) 49.275,92.181 49.275,90.689 cw(c49.021,90.689) 49.021,90.435 46.5,90.435
  region: 44.004,95.515 cw(c44.004,95.769) 43.75,95.769 43.75,97.261 cw(c44.004,97.261) 44.004,97.515 49.021,97.515 cw(c49.021,97.261) 49.275,97.261 49.275,95.769 cw(c49.021,95.769) 49.021,95.515 46.5,95.515
  region: 44.004,100.595 cw(c44.004,100.849) 43.75,100.849 43.75,102.341 cw(c44.004,102.341) 44.004,102.595 49.021,102.595 cw(c49.021,102.341) 49.275,102.341 49.275,100.849 cw(c49.021,100.849) 49.021,100.595 46.5,100.595
  region: 44.004,103.135 cw(c44.004,103.389) 43.75,103.389 43.75,104.881 cw(c44.004,104.881) 44.004,105.135 49.021,105.135 cw(c49.021,104.881) 49.275,104.881 49.275,103.389 cw(c49.021,103.389) 49.021,103.135 46.5,103.135
  region: 44.004,108.215 cw(c44.004,108.469) 43.75,108.469 43.75,109.961 cw(c44.004,109.961) 44.004,110.215 49.021,110.215 cw(c49.021,109.961) 49.275,109.961 49.275,108.469 cw(c49.021,108.469) 49.021,108.215 46.5,108.215
  region: 44.004,110.755 cw(c44.004,111.009) 43.75,111.009 43.75,112.501 cw(c44.004,112.501) 44.004,112.755 49.021,112.755 cw(c49.021,112.501) 49.275,112.501 49.275,111.009 cw(c49.021,111.009) 49.021,110.755 46.5,110.755
  region: 44.004,118.375 cw(c44.004,118.629) 43.75,118.629 43.75,120.121 cw(c44.004,120.121) 44.004,120.375 49.021,120.375 cw(c49.021,120.121) 49.275,120.121 49.275,118.629 cw(c49.021,118.629) 49.021,118.375 46.5,118.375
  region: 44.004,115.835 cw(c44.004,116.089) 43.75,116.089 43.75,117.581 cw(c44.004,117.581) 44.004,117.835 49.021,117.835 cw(c49.021,117.581) 49.275,117.581 49.275,116.089 cw(c49.021,116.089) 49.021,115.835 46.5,115.835
Mechanical 1:
  lines w0.1: 120.625,88.025 120.675,87.975 120.675,86.22 cw(c119.405,86.22) 119.405,84.95 79.12,84.95 ccw(c79.12,81.884) 76.952,84.052 66.773,73.873 cw(c64.605,76.041) 64.605,72.975 44.745,72.975 cw(c44.745,74.245) 43.475,74.245 43.475,120.83 cw(c44.745,120.83) 44.745,122.1 46.25,122.1 65.938,122.1 cw(c65.938,120.26) 67.239,121.561 77.811,110.989 ccw(c79.112,112.29) 79.112,110.45 119.405,110.45 cw(c119.405,109.18) 120.675,109.18 120.675,95.075 120.625,95.025

## Text inside footprints (layer, text, board x,y; h text height)
J2: Top Overlay "Plated Edge" at 117.597,88.67 h1.2 r90